# Altium PCB mchf_pro_rf.PcbDoc (part 3 of 3)
Units mil, origin at the board's own origin, x right, y up, seen from the top; angles counter-clockwise.
Board outline 7874.02 x 5512.23 mil, 2 copper layers (Top Layer, Bottom Layer); 347 components, 225 nets, 1009 pads, 443 vias.
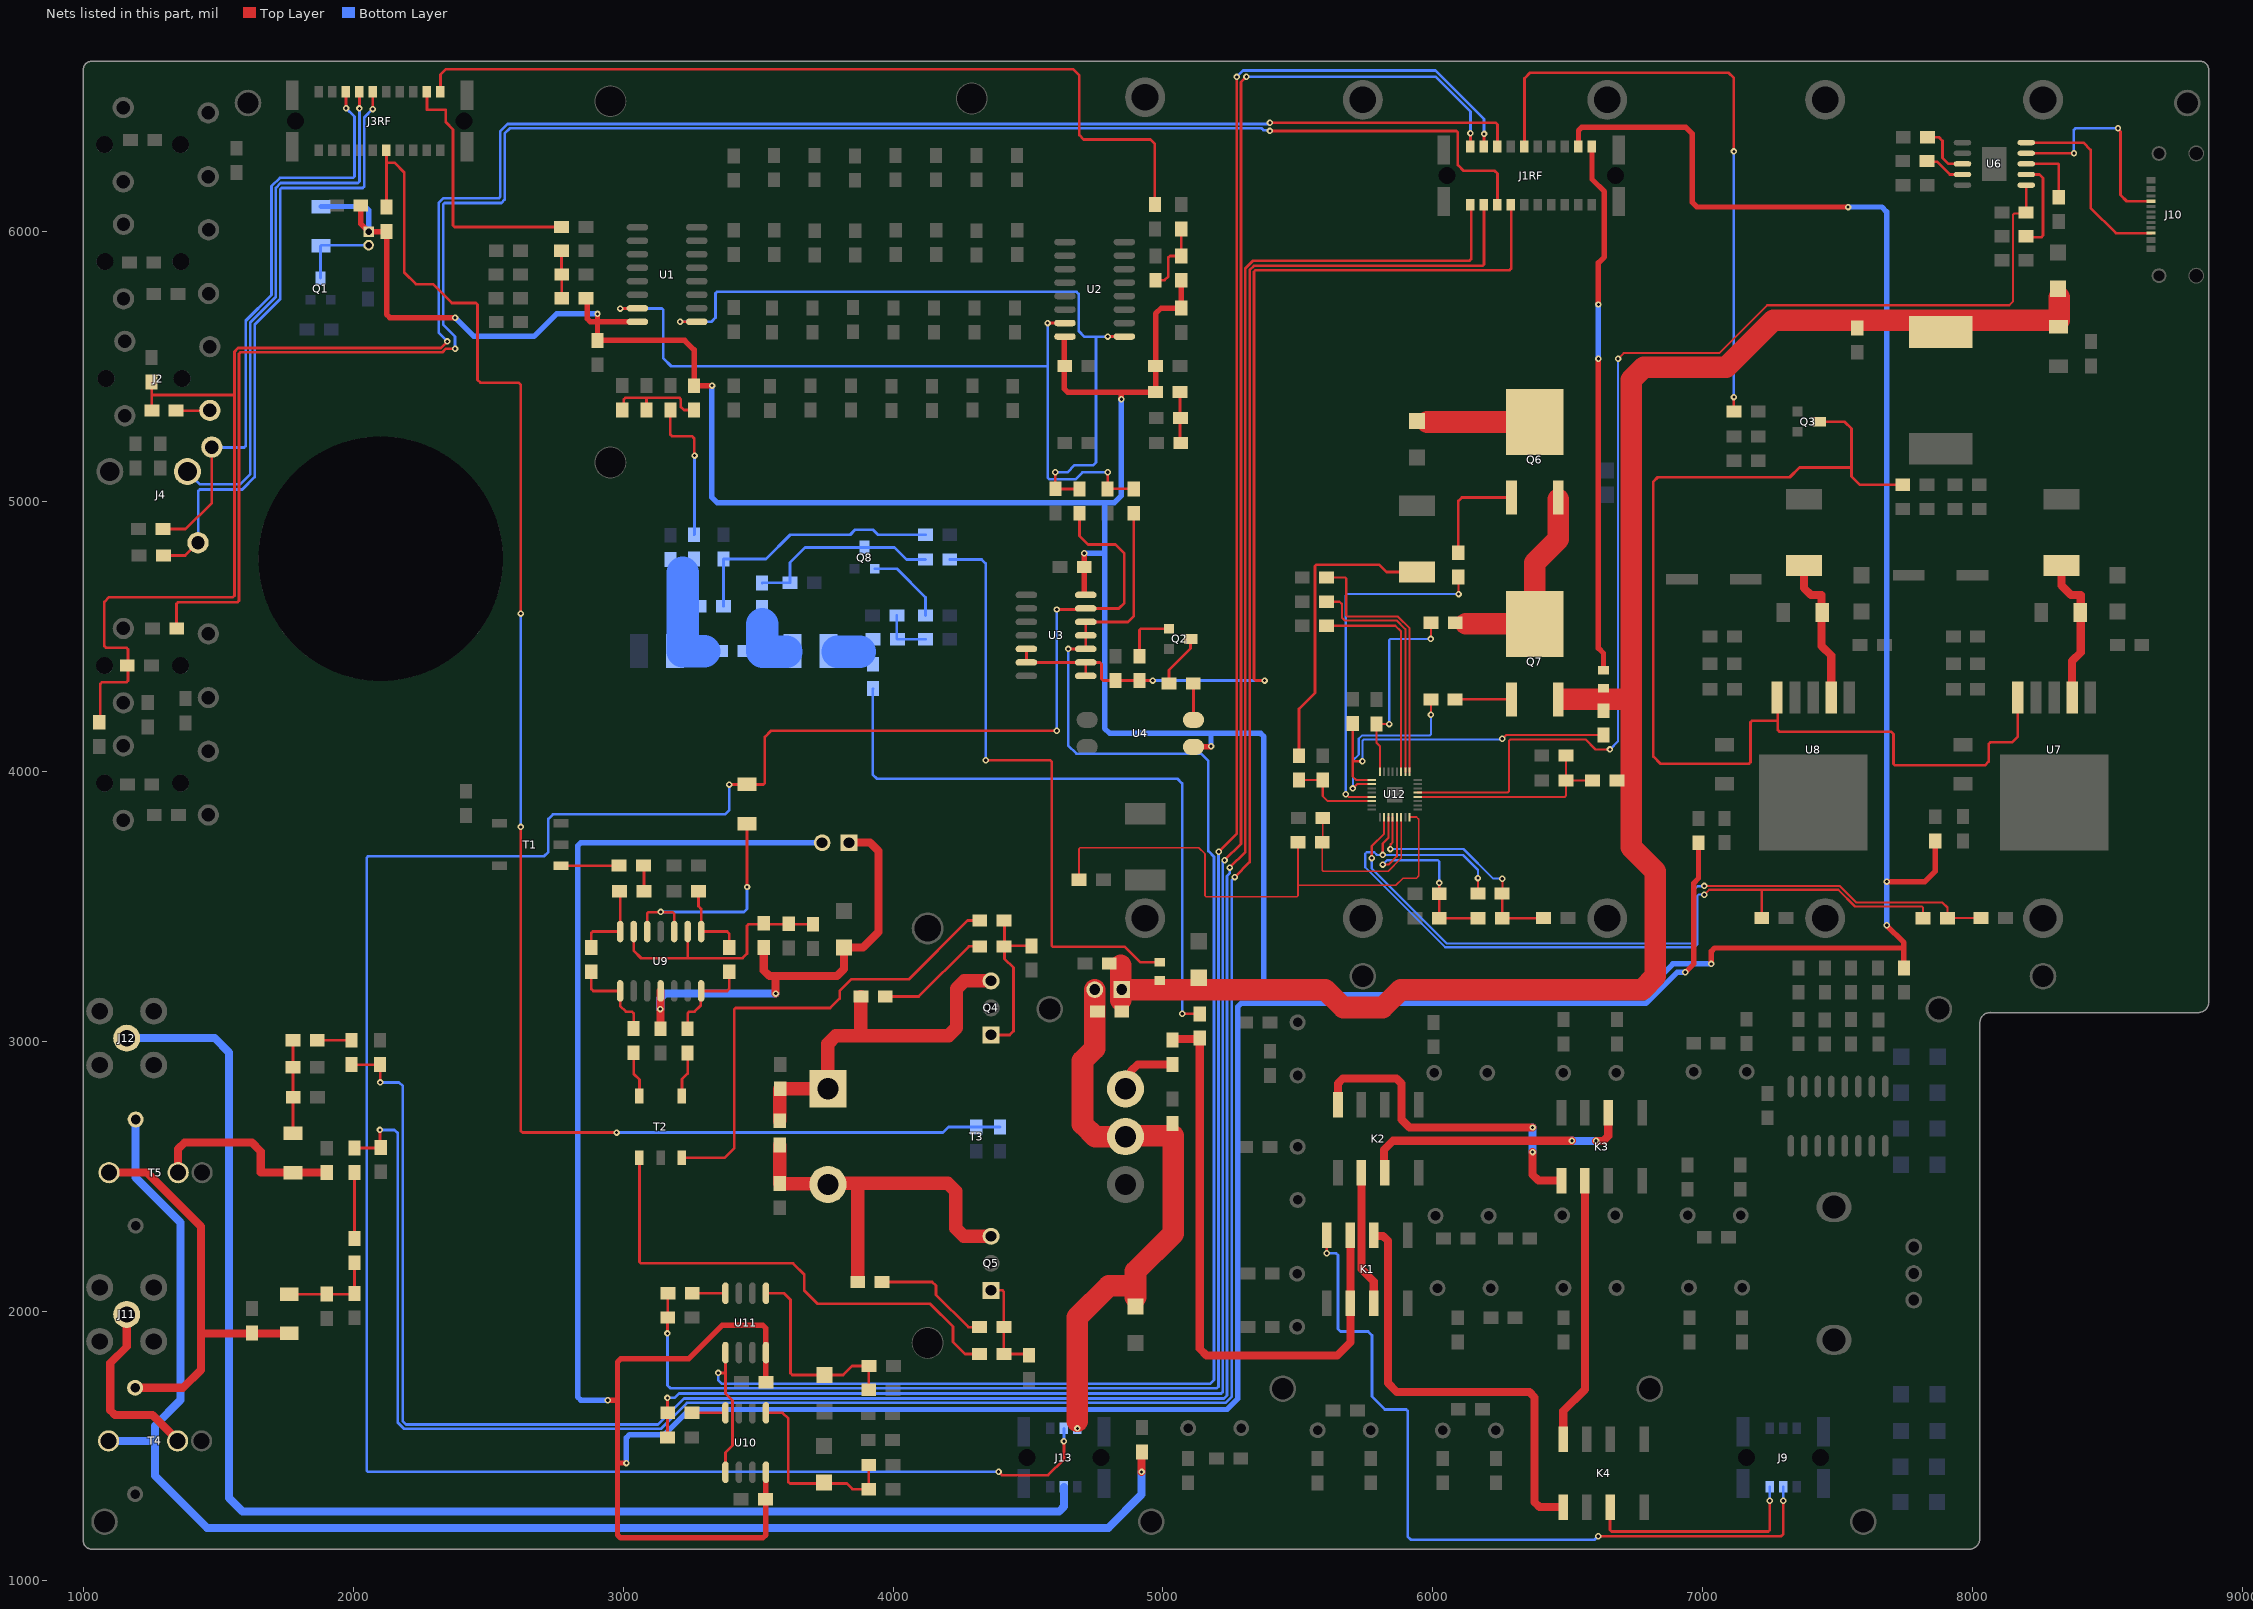
[diagram p3: the nets of this part, all layers, seen from the top]

## Via types
v1: diameter 30, hole 15, Top Layer to Bottom Layer, 263 vias
v2: diameter 24, hole 12, Top Layer to Bottom Layer, 180 vias

## Nets (pads, with @x,y where several pads share a name; then routed paths per layer and width w, separated by ;. In a path a pad name is that pad's centre, name@x,y a point inside that pad or via, vN(x,y) a via of type N, cw(c..) or ccw(c..) an arc to the next point about the centre after c; other vN are vias at no path point) (continued)
NetC93_1: C93.1 T1.1 | length 220.8
  Top Layer w10: T1.1@2770.17,3649.26 2770.91,3650 C93.1@2985,3650 C93.1@2989,3654
NetC93_2: C93.2 R46.2 | length 95.8
  Top Layer w10: C93.2@3075,3650 3077,3648 R46.2@3077,3555
NetC94_2: C94.2 R42.2 R43.2 U9.2 U9.6 | length 961.3
  Top Layer w10: U9.6@3039,3406 3039,3335 3067,3307 3239,3307 U9.2@3239,3406 ; 3239,3307.21 3442.21,3307.21 3459,3324 3459,3427.14 3464.86,3433 3517.14,3433 R43.2@3521,3436.86 3524.86,3433 3613.78,3433 R42.2@3703,3433
NetC95_2: C95.2 C96.1 R43.1 RFC4.2 U9.11 | length 1732.7
  Top Layer w30: C95.2@3138,3046 3138.5,3046.5 3138.5,3185.5 U9.11@3139,3186 ; R43.1@3521,3346.86 3521,3261.57 3541.57,3241 3563,3241 ; v2(3565,3176) 3565,3239 3563,3241 ; RFC4.2@3840,3735.18 3914.66,3735.18 3946,3703.84 3946,3404 3888.83,3346.83 3818.08,3346.83 3818.08,3267.08 3792,3241 3563,3241
  Bottom Layer w30: v2(3137.35,3118.77) 3137.35,3158.43 3154.92,3176 v2(3565,3176)
NetC97_1: C97.1 C99.1 Q4.1 R50.1 | length 613.3
  Top Layer w10: Q4.1@4363,3023 4432,3023 4446,3037 4446,3272 4413,3305 C99.1@4413,3351 ; C97.1@4413,3447 C99.1@4413,3351 ; R50.1@4513,3353 4415,3353 C99.1@4413,3351
NetC97_2: C97.2 T2.3 | length 1785.2
  Top Layer w10: T2.3@3217.74,2567.83 3376.26,2567.83 3411.25,2602.81 3411.25,3117.14 3417.1,3123 3767,3123 3802,3158 3802,3186.12 3844.91,3229.02 4058.02,3229.02 4276,3447 C97.2@4321,3447
NetC98_1: C98.1 C100.1 Q5.1 R51.1 | length 367.8
  Top Layer w10: Q5.1@4363,2077 4404.74,2077 4410.6,2071.14 C100.1@4410.6,1940.35 C98.1@4410.6,1840.78 R51.1@4498.05,1840.78
NetC98_2: C98.2 T2.1 | length 1851.7
  Top Layer w10: T2.1@3060.26,2567.83 3060.26,2182.6 3066.12,2176.74 3629.85,2176.74 3671,2135.59 3671,2076 3720,2027 4137,2027 4222,1942 4222,1885.29 4266.51,1840.78 C98.2@4317,1840.78
NetC99_2: C99.2 R52.2 | length 427
  Top Layer w10: R52.2@3971,3165 4094.94,3165 4280.94,3351 C99.2@4321,3351
NetC100_2: C100.2 R53.2 | length 451
  Top Layer w10: R53.2@3959,2108 4145,2108 4159,2094 4159,2060 4278.65,1940.35 C100.2@4320.6,1940.35
NetC101_2: C101.2 C102.1 Q4.3 R52.1 T3.1 | length 1394.2
  Top Layer w50: C102.1@3580,2705 3581,2706 3581,2822.33 C101.2@3582,2823.33 T3.1@3758.64,2823.33 3758.64,2990.71 3787.93,3020 3879,3020 ; R52.1@3881,3165 3881,3022 3879,3020 ; Q4.3@4363,3223 4264.29,3223 4235,3193.71 4235,3049.29 4205.71,3020 3879,3020
NetC102_2: C102.2 C103.1 Q5.3 R53.1 T3.3 | length 1434.2
  Top Layer w50: C102.2@3580,2615 C103.1@3580,2473 3582,2471 3756.64,2471 T3.3@3758.64,2469 3762.64,2473 3869,2473 ; R53.1@3869,2128.84 3869,2473 ; Q5.3@4363,2277 4261.29,2277 4232,2306.29 4232,2443.71 4202.71,2473 3869,2473
NetC112_1: C112.1 R57.2 RFC6.1 U10.1 | length 728.7
  Top Layer w10: U10.1@3529,1623 3591.13,1623 3612,1602.13 3612,1366.86 3617.86,1361 3740,1361 C112.1@3744,1365 3748,1361 3829,1361 3849.9,1340.1 R57.2@3910.14,1340.1 3910.14,1429.18 RFC6.1@3910,1429.32
NetC113_1: C113.1 R58.2 RFC7.1 U11.1 | length 768.7
  Top Layer w10: U11.1@3529,2066 3595.81,2066 3619.86,2041.95 3619.86,1770.14 3626.68,1763.32 C113.1@3746,1763.32 3815.32,1763.32 3848.32,1796.32 R58.2@3911,1796.32 3910,1795.32 RFC7.1@3910,1708.32
NetC119_1: C119.1 R63.1 U12.2 | length 2854.7
  Top Layer w8: v2(5773.47,3678) 5773.47,3722.87 5819.1,3768.5 U12.2@5819.1,3830.12 ; v2(7005,3575) 7507.49,3575 7569.47,3513.02 7887.98,3513.02 7906.14,3494.86 C119.1@7906.14,3455.28 7906.86,3456 R63.1@8030.85,3456
  Bottom Layer w8: v2(5773.47,3678) 5773.47,3639.43 6050.9,3362 6959.29,3362 6965,3367.71 6965,3558 6981,3574 7004,3574 v2(7005,3575)
NetC119_2: C119.2 C120.1 R64.1 U12.3 | length 3289.4
  Top Layer w8: v2(5813.98,3689.73) 5813.98,3731.88 5834.85,3752.75 U12.3@5834.85,3830.2 ; C120.1@6166.41,3546.57 6166.88,3547.04 v2(6166.88,3603.96) ; v2(7004.95,3542.67) 7023.28,3561 7218,3561 ; R64.1@7218,3456 7218,3561 ; C119.2@7816.14,3455.28 7816.14,3494.33 7811.46,3499.02 7563.67,3499.02 7501.69,3561 7218,3561
  Bottom Layer w8: v2(6166.88,3603.96) 6166.74,3604.1 6166.74,3634.26 6111.27,3689.73 v2(5813.98,3689.73) 5792.85,3689.73 5782.58,3700 5755.12,3700 5749.52,3694.4 5749.52,3643.58 6045.11,3348 6970,3348 6979.42,3357.42 6979.42,3537.98 6984.11,3542.67 v2(7004.95,3542.67)
NetC120_2: C120.2 C121.1 R65.1 U12.4 | length 897
  Top Layer w8: v2(5842.55,3711.73) 5842.55,3728.71 5850.6,3736.75 U12.4@5850.6,3830.12 ; C120.2@6256.41,3546.57 6257.18,3547.34 v2(6257.18,3601.87) ; C120.2@6256.74,3561.13 C121.1@6256.74,3455.06 6257.18,3455.5 R65.1@6410,3455.5
  Bottom Layer w8: v2(5842.55,3711.73) 6113.27,3711.73 6223.13,3601.87 v2(6257.18,3601.87)
NetC121_2: C121.2 C122.1 R66.1 U12.5 | length 781.7
  Top Layer w8: v2(5814,3654) 5835.3,3654 5866.34,3685.04 U12.5@5866.34,3830.12 ; v2(6023.23,3586) C122.1@6023.23,3546.13 R66.1@6023.23,3455.29 6023.46,3455.06 C121.2@6166.74,3455.06
  Bottom Layer w8: v2(5814,3654) 5830,3670 6018.54,3670 6023.23,3665.31 v2(6023.23,3586)
NetC123_2: C123.2 R62.1 U12.30 | length 336.4
  Top Layer w8: R62.1@5504.18,3967 C123.2@5592,3967 5592,3907.51 5610.43,3889.08 U12.30@5773.47,3889.08
NetC124_2: C124.2 R71.2 U12.24 | length 756.6
  Top Layer w8: U12.24@5803.35,3997.7 5803.35,4093.65 5791,4106 C124.2@5791,4175 5791.41,4174.59 v2(5838.03,4174.59) ; v2(5992.33,4490) 5992.33,4549.56 R71.2@5992.66,4549.89
  Bottom Layer w8: v2(5838.03,4174.59) 5838.03,4485.31 5842.71,4490 v2(5992.33,4490)
NetC125_1: C125.1 R73.1 U12.25 | length 1285.8
  Top Layer w8: C125.1@5703,4176.47 5703,4037 ; v2(5739,4037) 5703,4037 ; U12.25@5773.47,3967.82 5715.18,3967.82 5703,3980 5703,4037 ; v2(6257.18,4119.86) 6271.32,4134 R73.1@6632,4134
  Bottom Layer w8: v2(5739,4037) 5739,4113.15 5743.69,4117.84 6255.16,4117.84 v2(6257.18,4119.86)
NetC126_1: C126.1 R77.2 R78.1 U12.12 | length 797.4
  Top Layer w8: U12.12@5943.47,3904.83 U12.12@5943.47,3904.83 6488.49,3904.76 6493.17,3909.45 R78.1@6493.17,3966 ; C126.1@6493.17,4057 R78.1@6493.17,3966 ; R77.2@6591.37,3966 R78.1@6493.17,3966
NetC129_2: C129.2 D7.2 R80.2 RFC8.2 | length 345
  Top Layer w10: D7.2@1777,2658 C129.2@1777,2903 RFC8.2@1777,3003
NetC130_1: C130.1 D8.2 R82.1 RFC9.2 | length 357.2
  Top Layer w10: D8.2@1763,2062 2002,2062 C130.1@2005,2065 RFC9.2@2005,2179
NetC131_1: C131.1 D9.2 RFC10.1 | length 82
  Bottom Layer w120: D9.2@3794,4443 3876,4443
NetC131_2: C131.2 M10.2 | length 2397.6
  Top Layer w10: v2(5071,3101) M10.2@5136,3101
  Bottom Layer w10: C131.2@3926,4306 3924.35,4304.35 3924.35,3988.45 3940.8,3972 5053.73,3972 5071,3954.73 v2(5071,3101)
NetC132_2: C132.2 R84.2 RFC10.2 | length 192.8
  Bottom Layer w10: C132.2@4014,4577 4014,4491 RFC10.2@4016,4489 R84.2@4120,4489
NetC133_1: C133.1 Q8.3 R86.1 RFC11.1 | length 723.1
  Bottom Layer w10: RFC11.1@3515,4697 3516,4698 C133.1@3618,4698 3618,4773 3673.61,4828.61 3892.61,4828.61 Q8.3@3894,4830 3895.39,4828.61 4004.8,4828.61 4049.41,4784 R86.1@4120,4784
NetC134_1: C134.1 C136.2 C137.2 D10.2 RFC12.1 | length 370.2
  Bottom Layer w120: 3221,4735 3221,4444.78 3301,4444.78
NetC134_2: C134.2 D9.1 RFC11.2 | length 189
  Bottom Layer w120: 3515,4544 3515,4444.77 3516.77,4443 D9.1@3604,4443
NetC135_2: C135.2 R83.1 RFC12.2 | length 975.5
  Bottom Layer w10: RFC12.2@3372,4611 C135.2@3372,4786 3529,4786 3619,4876 3841.34,4876 3859.74,4894.4 3926,4894.4 3944.4,4876 R83.1@4120,4876
NetC136_1: C136.1 M1.2 | length 543.7
  Top Layer w10: M1.2@3175.08,5338.33 3175.08,5246.86 3180.94,5241 3255.5,5241 3263,5233.5 3263,5170.74 v2(3264.5,5169.24)
  Bottom Layer w10: C136.1@3263,4876 3264.5,4877.5 v2(3264.5,5169.24)
NetD1_1: D1.1 P1.2 Q1.3 | length 297.7
  Bottom Layer w10: Q1.3@1879,5827 1879,5945 D1.1@1881,5947 1883,5949 P1.2@2057,5949
NetD3_2: D3.2 L28.1 U7.2 | length 552.9
  Top Layer w30: D3.2@8328.45,4761.83 8328.45,4688.55 8364,4653 8400.09,4653 8400.09,4440.09 8368.09,4408.09 U7.2@8368.09,4273.06
NetD4_2: D4.2 L29.1 U8.2 | length 554.1
  Top Layer w30: D4.2@7373.99,4761.83 7373.99,4679.01 7400,4653 7439.6,4653 7439.6,4464.4 7475.6,4428.4 U8.2@7475.6,4273.06
NetD5_2: D5.2 U9.3 U9.5 | length 877.9
  Top Layer w10: U9.5@3089,3406 3089,3472.14 3094.86,3478 3183.14,3478 3189,3472.14 U9.3@3189,3406 ; v2(3459,3571) D5.2@3459,3805.8
  Bottom Layer w10: v2(3138.93,3478.68) 3448.1,3478.68 3459,3489.58 v2(3459,3571)
NetD6_2: D6.2 R62.2 | length 1118.2
  Top Layer w10: R62.2@5504.18,4057 5504.18,4231.18 5563.08,4290.08 5563.08,4759.22 5568.93,4765.08 5800.67,4765.08 5827.76,4738 D6.2@5941,4738
NetD7_1: D7.1 R79.2 T5.4 | length 739.6
  Top Layer w30: T5.4@1351.48,2512.85 1351.48,2599.76 1375.72,2624 1625,2624 1657.5,2591.5 1657.5,2512.85 1776.85,2512.85 D7.1@1777,2513 R79.2@1902,2513
NetD8_1: D8.1 R81.1 T4.2 T5.3 | length 1552.7
  Top Layer w30: T5.3@1095.57,2512.85 1236.15,2512.85 1436,2313 1436,1917 ; T4.2@1192,1715.7 1369.7,1715.7 1436,1782 1436,1917 ; D8.1@1763,1917 1436,1917
NetF2_2: F2.2 Q6.2 | length 398.6
  Top Layer w80: 5979.05,5293.53 Q6.2@6377.61,5293.53
NetJ1RF_A11: J1RF.A11 M9.1 | length 1976
  Top Layer w20: J1RF.A11@6589.17,6314.54 6589.17,6193.03 6635,6147.2 6635,5905.04 6613,5883.04 v2(6613,5729) ; v2(6613,5528) 6613,4456 6632,4437 M9.1@6632,4374.5
  Bottom Layer w20: v2(6613,5528) v2(6613,5729)
NetJ2_R: J2.R R15.1 | length 125
  Top Layer w10: R15.1@1344,5335.69 J2.R@1468.96,5335.69
NetJ9_B2: J9.B2 K1.4 | length 2946.4
  Top Layer w10: v2(5607,2214) 5607,2280.59 K1.4@5607.39,2280.98 ; v2(6612.18,1165.81) 7289.81,1165.81 7298,1174 v2(7298,1297.39)
  Bottom Layer w10: v2(5607,2214) 5641,2214 5648,2207 5648,1934 5658,1924 5760,1924 5774,1910 5774,1683.13 5821.72,1635.41 5900.75,1635.41 5906.61,1629.55 5906.61,1164.76 5918.63,1152.73 6599.11,1152.73 v2(6612.18,1165.81) ; v2(7298,1297.39) J9.B2@7298,1348.73
NetJ9_B3: J9.B3 K4.7 | length 841.4
  Top Layer w10: K4.7@6656.23,1274 6656.23,1188.96 6662.09,1183.11 7242.14,1183.11 7248,1188.96 v2(7248,1297.39)
  Bottom Layer w10: v2(7248,1297.39) J9.B3@7248,1348.73
NetJ10_A5: J10.A5 U6.7 | length 803.9
  Top Layer w10: U6.7@8198.11,6289.37 v2(8375,6289.37) ; v2(8538,6382) 8538,6378.7 8547.55,6369.14 8547.55,6134.33 8570.47,6111.42 J10.A5@8660.47,6111.42
  Bottom Layer w10: v2(8375,6289.37) 8374.46,6289.91 8374.46,6376.14 8380.31,6382 v2(8538,6382)
NetJ10_B5: J10.B5 U6.6 | length 727.5
  Top Layer w10: U6.6@8198.11,6328.74 8409.88,6328.74 8436.63,6302 8436.63,6086.55 8529.87,5993.31 J10.B5@8660.47,5993.31
NetJ11_1: J11.1 T4.4 | length 678.8
  Top Layer w30: J11.1@1161,1987.4 1161,1868 1100,1807 1100,1632.7 1117.57,1615.12 1256.88,1615.12 1349.48,1522.52 T4.4@1349.48,1518.85
NetJ12_1: J12.1 J13.A2 | length 5245.2
  Bottom Layer w30: J12.1@1161,3011.02 1487.12,3011.02 1540,2958.15 1540,1308 1590,1258 4615.43,1258 4633,1275.57 J13.A2@4633,1348.73
NetK1_2: K1.2 K4.5 | length 1656.3
  Top Layer w30: K1.2@5780.62,2280.98 5780.62,2280.72 5783.34,2278 5815.43,2278 5833,2260.43 5833,1733 5866,1700 6357.37,1700 6377.05,1680.32 6377.05,1291.57 6394.62,1274 K4.5@6483,1274
NetK1_3: K1.3 K1.6 M10.1 M11.1 | length 2234.3
  Top Layer w30: M11.1@5035,3004 5038.5,3007.5 M10.1@5132.5,3007.5 ; M10.1@5136,3011 5136,1860.57 5160.57,1836 5645.74,1836 5694.01,1884.26 K1.6@5694.01,2029.02 K1.3@5694.01,2280.98
NetK1_7: K1.7 K2.6 | length 501.9
  Top Layer w30: K2.6@5735.01,2512.02 5735.01,2155.27 5780.62,2109.65 K1.7@5780.62,2029.02
NetK2_4: K2.4 K3.5 | length 1251.8
  Top Layer w30: K2.4@5648.39,2763.98 5648.39,2843.43 5665.97,2861 5865.43,2861 5883,2843.43 5883,2710.32 5913.32,2680 v2(6369,2680) ; v2(6369,2589) 6369,2505 6390.98,2483.02 K3.5@6476.39,2483.02
  Bottom Layer w30: v2(6369,2589) v2(6369,2680)
NetK2_7: K2.7 K3.2 | length 1025.1
  Top Layer w30: K2.7@5821.62,2512.02 5818.91,2514.73 5818.91,2597.57 5852.34,2631 v2(6515,2631) ; v2(6604.47,2630.73) 6631.73,2630.73 6649.62,2648.62 K3.2@6649.62,2734.98
  Bottom Layer w30: v2(6515,2631) 6515.27,2630.73 v2(6604.47,2630.73)
NetK3_6: K3.6 K4.4 | length 990.2
  Top Layer w30: K4.4@6483,1525.97 6483,1629.85 6563.01,1709.86 K3.6@6563.01,2483.02
NetM11_2: M11.2 T3.4 | length 238
  Top Layer w30: T3.4@4861,2823.33 4881.63,2843.96 4881.63,2889.07 4906.55,2914 M11.2@5035,2914
NetM12_2: M12.2 T4.3 T5.2 | length 5545
  Top Layer w30: v2(4920.84,1403.8) 4920.84,1476.84 M12.2@4922,1478
  Bottom Layer w30: T4.3@1093.57,1518.85 1265.25,1518.85 ; T5.2@1194,2709.7 1194,2495 1360.55,2328.45 1360.55,1670.55 1265.25,1575.25 1265.25,1518.85 ; v2(4920.84,1403.8) 4920.84,1319.84 4798,1197 1458,1197 1265.25,1389.75 1265.25,1518.85
NetM22_1: M22.1 RFC8.1 | length 127
  Top Layer w10: RFC8.1@1867,3003 M22.1@1994,3003
NetM23_1: M23.1 RFC9.1 | length 244.8
  Top Layer w10: M23.1@2004.78,2513.71 2005,2513.48 RFC9.1@2005,2269
NetQ2_1: Q2.1 R20.1 | length 207.7
  Top Layer w10: R20.1@4913,4425.85 4913,4522.14 4918.86,4528 Q2.1@5022,4528
NetQ2_3: Q2.3 R19.2 | length 197.9
  Top Layer w10: R19.2@5021.99,4325.23 5021.99,4374.99 5102,4455 Q2.3@5102,4490
NetQ6_1: Q6.1 R70.2 | length 394.1
  Top Layer w10: R70.2@6094.04,4809.29 6094.04,5001.04 6107,5014 Q6.1@6291,5014
NetQ6_3: Q6.3 Q7.2 R71.1 | length 753.9
  Top Layer w80: 6121,4546 Q7.2@6377.61,4546 6377.61,4772.61 6464.23,4859.23 Q6.3@6464.23,5007.43
NetQ7_1: Q7.1 R72.2 | length 209.3
  Top Layer w10: R72.2@6082.33,4265 6083.81,4266.47 Q7.1@6291,4266.47
NetQ8_1: Q8.1 R85.2 | length 298.9
  Bottom Layer w10: Q8.1@3932,4750 4014,4750 4120,4644 R85.2@4120,4577
NetR1_2: R1.2 R3.2 R4.1 | length 385.8
  Top Layer w10: R3.2@2996.62,5338.33 3002.48,5344.19 3002.48,5377.84 3008.34,5383.7 3086.72,5383.7 ; R1.2@3086.72,5338.33 3086.72,5383.7 ; R4.1@3263,5338 3225.24,5338 3213.72,5349.52 3213.72,5377.84 3207.86,5383.7 3086.72,5383.7
NetR2_2: R2.2 R5.2 R6.1 | length 274.1
  Top Layer w10: R2.2@4972,5819 5006,5819 5020,5833 5020,5903 5026,5909 R5.2@5067.78,5909 R6.1@5067.78,6009
NetR7_2: R7.2 R8.1 R11.1 | length 176.6
  Top Layer w10: R11.1@2772,5928.29 2772,5840.2 R7.2@2772.33,5839.87 R8.1@2772.33,5751.87
NetR9_2: R9.2 R10.1 R12.1 | length 190
  Top Layer w10: R9.2@5062.63,5404.25 5062.63,5218.98 R12.1@5066,5215.61
NetR19_1: R19.1 U4.2 | length 135.6
  Top Layer w10: R19.1@5111.99,4325.23 5112.85,4324.38 U4.2@5112.85,4190
NetR29_1: R29.1 U6.8 | length 242.7
  Top Layer w10: U6.8@8198.11,6250 8316,6250 8318.45,6247.55 R29.1@8318.45,6126.23
NetR31_1: R31.1 U6.3 | length 207.3
  Top Layer w10: R31.1@7832.18,6348.63 7874.5,6348.63 7887.88,6335.26 7887.88,6272.5 7910.38,6250 U6.3@7961.89,6250
NetR32_1: R32.1 U6.9 | length 347.5
  Top Layer w10: R32.1@8195.81,5978.64 8254.32,5978.64 8260.17,5984.5 8260.17,6197.83 8247.37,6210.63 U6.9@8198.11,6210.63
NetR33_2: R33.2 U6.2 | length 151.7
  Top Layer w10: R33.2@7830.85,6260.44 7833,6258.28 7867.49,6258.28 7915.14,6210.63 U6.2@7961.89,6210.63
NetR34_1: R34.1 U6.10 U12.13 | length 4404.4
  Top Layer w8: U12.13@5943.47,3920.58 6277.14,3920.58 6281.82,3925.26 6281.82,4113.21 6286.51,4117.89 6565.4,4117.89 6602.58,4080.71 v2(6655.77,4080.71) ; v2(6685.75,5528.16) 6686.16,5528.16 6706.88,5548.88 7060.82,5548.88 7238.41,5726.46 8135.13,5726.46 8149.39,5740.73 8149.39,6061.45 8154.08,6066.14 8193.86,6066.14 R34.1@8197.76,6070.05 ; R34.1@8196.5,6071.31 8198.11,6072.91 U6.10@8198.11,6171.26
  Bottom Layer w8: v2(6655.77,4080.71) 6685.75,4110.69 v2(6685.75,5528.16)
NetR44_1: R44.1 R48.2 U9.14 | length 342.8
  Top Layer w10: R48.2@3239,3046 3239,3103.14 3244.86,3109 3265,3109 3287,3131 3287,3184 U9.14@3289,3186 3385.29,3186 3393,3193.71 R44.1@3393,3256.86
NetR44_2: R44.2 R45.1 U9.1 | length 311.8
  Top Layer w10: R45.1@3279,3555 3279,3500 3289,3490 U9.1@3289,3406 3385.29,3406 3393,3398.29 R44.2@3393,3346.86
NetR46_1: R46.1 R47.2 U9.7 | length 312.8
  Top Layer w10: R47.2@2881.78,3346.86 2881.78,3400.14 2887.64,3406 U9.7@2989,3406 2989,3553 R46.1@2987,3555
NetR47_1: R47.1 R49.2 U9.8 | length 346.8
  Top Layer w10: R47.1@2881.78,3256.86 2881.78,3193.71 2889.49,3186 U9.8@2989,3186 2989,3130 3010,3109 3032.92,3109 3038.78,3103.14 R49.2@3038.78,3046.86
NetR48_1: R48.1 T2.4 | length 168.6
  Top Layer w10: T2.4@3217.74,2796.17 3217.74,2859 3239,2880.26 R48.1@3239,2956
NetR49_1: R49.1 T2.6 | length 169.6
  Top Layer w10: R49.1@3038.78,2956.86 3038.78,2879.22 3060.26,2857.74 T2.6@3060.26,2796.17
NetR55_2: R55.2 U10.4 | length 123.9
  Top Layer w10: R55.2@3255.14,1623 U10.4@3379,1623
NetR56_2: R56.2 U11.4 | length 123
  Top Layer w10: R56.2@3256,2066 U11.4@3379,2066
NetR70_1: R70.1 U12.29 | length 1320.9
  Top Layer w8: v2(5676.99,3914.6) 5686.77,3904.83 U12.29@5773.47,3904.83 ; R70.1@6094.04,4719.29 6095,4718.33 v2(6095,4656)
  Bottom Layer w8: v2(5676.99,3914.6) 5676.99,4651.31 5681.68,4656 v2(6095,4656)
NetR72_1: R72.1 U12.26 | length 672.9
  Top Layer w8: v2(5703,3936.32) 5718.75,3952.07 U12.26@5773.47,3952.07 ; R72.1@5992.33,4265 5992.66,4264.67 v2(5992.66,4209)
  Bottom Layer w8: v2(5703,3936.32) 5703.97,3937.3 5703.97,4040.44 5725,4061.46 5725,4120.06 5736.78,4131.84 5987.98,4131.84 5992.66,4136.53 v2(5992.66,4209)
NetR74_1: R74.1 U12.19 | length 804.6
  Top Layer w8: R74.1@5606.14,4538.88 5860.67,4538.88 5882.09,4517.46 U12.19@5882.09,3997.7
NetR75_1: R75.1 U12.18 | length 891.6
  Top Layer w8: R75.1@5606.14,4627.7 5654.3,4627.7 5662.87,4619.13 5662.87,4568.81 5673.69,4558 5865.78,4558 5897.84,4525.94 U12.18@5897.84,3997.7
NetR76_1: R76.1 U12.17 | length 997.1
  Top Layer w8: R76.1@5606.14,4718.21 5673.97,4718.21 5678.65,4713.53 5678.65,4577.97 5683.34,4573.29 5870.29,4573.29 5913.59,4529.99 U12.17@5913.59,3997.7
P_DAH: C31.1 J1RF.A18 R15.2 R17.1 R18.1 | length 8033.9
  Top Layer w10: R18.1@1059.35,4181.35 1063.13,4185.13 1063.13,4323.86 1068.99,4329.72 1160.14,4329.72 1166,4335.57 1166,4365.8 1166,4390.94 1166,4451.4 1160.14,4457.26 1083.86,4457.26 1078,4463.12 1078,4627 1095.57,4644.57 1554.01,4644.57 1559.87,4650.43 1559.87,5393.54 ; R15.2@1254,5335.69 1254,5393.54 ; C31.1@1254,5436 1254,5393.54 ; v2(2348.8,5592.29) 2324.54,5568.03 1573.92,5568.03 1559.87,5553.98 1559.87,5393.54 ; v2(5396,6402) 6233.19,6402 6239.05,6396.14 J1RF.A18@6239.05,6309 ; 1254,5393.54 1559.87,5393.54
  Bottom Layer w10: v2(2348.8,5592.29) 2317.07,5624.02 2317.07,6106.34 2333.22,6122.49 2539.1,6122.49 2544.95,6128.35 2544.95,6371.16 2571.8,6398 5392,6398 v2(5396,6402)
P_DIT: J1RF.A8 R16.1 | length 7025.5
  Top Layer w10: R16.1@1346,4528.74 1345.68,4529.06 1345.68,4620.14 1351.54,4626 1570.85,4626 1576.71,4631.86 1576.71,5546.17 1582.57,5552.03 2331.17,5552.03 2344.3,5565.16 v2(2377.36,5565.16) ; v2(5396,6372) 6086.39,6372 6092.24,6366.14 6092.24,6245.91 6114.15,6224 6229,6224 6239.17,6213.83 J1RF.A8@6239.17,6098
  Bottom Layer w10: v2(2377.36,5565.16) 2377.36,5610.64 2333.07,5654.93 2333.07,6099.14 2338.93,6105 2548.73,6105 2560.95,6117.22 2560.95,6362.65 2580.31,6382 5364.63,6382 5371.95,6374.68 5393.32,6374.68 v2(5396,6372)
PA_BIAS0: C110.1 J1RF.A20 R55.1 | length 8135.8
  Top Layer w10: C110.1@3164,1532 3164,1621.86 R55.1@3165.14,1623 3164,1624.14 v2(3164,1678) ; v2(5228.31,3670) 5228.31,3670.31 5289,3731 5289,6553 v2(5309,6573) ; J1RF.A20@6139.17,6314.54 v2(6139.17,6363.11)
  Bottom Layer w10: v2(3164,1678) 3164.7,1678.7 3191,1678.7 3206.63,1694.33 5215.45,1694.33 5221.31,1700.19 5221.31,3663.31 5228,3670 v2(5228.31,3670) ; v2(5309,6573) 6010.15,6573 6139.17,6443.98 v2(6139.17,6363.11)
PA_BIAS1: C111.2 J1RF.A19 R56.1 | length 8372.8
  Top Layer w10: v2(3164,1917) 3164,1974.63 C111.2@3165.14,1975.78 3165.14,2065.14 R56.1@3166,2066 ; v2(5207,3702) 5273,3768 v2(5273,6572) ; J1RF.A19@6189.17,6314.54 6189.42,6314.78 v2(6189.42,6360.87)
  Bottom Layer w10: v2(3164,1917) 3164,1724.75 3174.51,1714.24 5199.45,1714.24 5205.31,1720.1 5205.31,3557.22 5205.31,3700.31 v2(5207,3702) ; v2(5273,6572) 5297,6596 6009.78,6596 6189.42,6416.36 v2(6189.42,6360.87)
PA_TEMP: C117.1 J3RF.A16 R60.2 R61.1 | length 5980.3
  Top Layer w10: J3RF.A16@2123.07,6300.39 2123.07,6254.45 ; R60.2@2123.25,6089.86 2123.07,6090.04 2123.07,6254.45 ; v2(2621,3793.39) 2621,2667.08 2626.86,2661.22 v2(2975.59,2661.22) ; v2(2621,4584) 2621,5431.19 2612.81,5439.38 2471.25,5439.38 2460.62,5450.01 2460.62,5728.79 2454.76,5734.65 2365.26,5734.65 2295.62,5804.28 2232.97,5804.28 2189,5848.25 2189,6218.44 2152.99,6254.45 2123.07,6254.45
  Bottom Layer w10: v2(2621,3793.39) v2(2621,4584) ; v2(2975.59,2661.22) 4185.08,2661.22 4205.86,2682 R61.1@4308,2682 C117.1@4396.43,2682
PACK_P: C78.2 C104.1 C105.2 D2.2 F1.1 M9.2 M121.2 Q7.3 R54.2 R73.2 R77.1 RFC1.1 RFC5.1 | length 6427.7
  Top Layer w80: 4844,3150.73 4844,3191 4844,3281 ; RFC5.1@4847,3191 4988,3191 5601.06,3191 5667.37,3124.69 5814.32,3124.69 5880.63,3191 6775.61,3191 6824.23,3239.62 6824.23,3628.77 6734.29,3718.71 6734.29,4266.47 6734.29,5449.54 6781.15,5496.41 7086.6,5496.41 7261.03,5670.84 7571.91,5670.84 8320,5670.84 8320,5756 ; 6487,4266.47 6722.4,4266.47
"PHONES L": C32.1 J3RF.A5 J4.T | length 2379.8
  Top Layer w10: C32.1@1297,4799 1377.54,4799 J4.T@1425,4846.46 ; v2(2072.15,6453.15) 2072.15,6516.93 J3RF.A5@2073.07,6516.93
  Bottom Layer w10: J4.T@1417.15,4828.68 J4.T@1434.92,4846.46 ; J4.T@1425,4846.46 1426.06,4847.52 1426.06,5038.02 1431.92,5043.88 1588.89,5043.88 1635,5089.99 1635,5654 1729.37,5748.37 1729.37,6154.43 1735.22,6160.29 2035.02,6160.29 2040.87,6166.15 2040.87,6421.87 v2(2072.15,6453.15)
"PHONES R": C33.2 J3RF.A3 J4.R | length 2216.3
  Top Layer w10: C33.2@1295,4897 1378.82,4897 1476.18,4994.36 J4.R@1476.18,5200.79 ; v2(1973.39,6456) 1973.39,6519.6 1976.4,6522.6 J3RF.A3@1977,6522
  Bottom Layer w10: J4.R@1473.99,5199 1596.14,5199 1602,5204.86 1602,5668.86 1697.37,5764.23 1697.37,6167.69 1727.99,6198.31 1998.61,6198.31 2004.47,6204.17 2004.47,6424.92 v2(1973.39,6456)
PTT: C25.1 M7.2 U1.1 U2.1 | length 2739.8
  Top Layer w10: v2(3210.86,5664.78) 3210.97,5664.89 3272.89,5664.89 U1.1@3273,5665 ; v2(4600.51,5107.29) 4600.51,5047.78 C25.1@4602.11,5046.18 4602.76,5045.53 M7.2@4690.7,5045.53 ; v2(4795,5610) 4795.07,5610.07 4856.71,5610.07 U2.1@4856.78,5610.14
  Bottom Layer w10: v2(3210.86,5664.78) 3326.48,5664.78 3342.03,5680.32 3342.03,5770.21 3347.88,5776.07 4679.93,5776.07 4688,5768 4688,5630.01 4708.01,5610 4751.51,5610 ; v2(4600.51,5107.29) 4645.65,5107.29 4672.36,5134 4742.04,5134 4751.51,5143.46 4751.51,5610 ; v2(4795,5610) 4751.51,5610
PTT_3V: C38.1 J1RF.A7 R20.2 U3.5 U3.6 U3.8 U3.9 | length 3786.6
  Top Layer w10: U3.5@4494,4453 U3.6@4494,4403 U3.9@4714,4403 ; U3.8@4714,4353 U3.9@4714,4403 ; v2(4962,4335.85) R20.2@4913,4335.85 C38.1@4824,4335.85 4777.77,4335.85 4771.91,4341.71 4771.91,4397.14 4766.06,4403 U3.9@4714,4403 ; v2(5376.15,4335.85) 5343.04,4335.85 5337.18,4341.71 5337.18,5850.14 5343.04,5856 6284.28,5856 6290.14,5861.86 6290.14,6097.03 J1RF.A7@6289.17,6098
  Bottom Layer w10: v2(4962,4335.85) v2(5376.15,4335.85)
PTT_5V: D5.1 J13.B2 M7.1 U3.13 | length 9148.5
  Top Layer w10: v2(3393,3950.61) 3458.76,3950.61 D5.1@3458.95,3950.8 3519,3950.8 3524.86,3956.66 3524.86,4127.52 3546.89,4149.55 v2(4606.11,4149.55) ; v2(4391.06,1404.48) 4391.3,1404.48 4403.92,1391.86 4574.5,1391.86 4633.14,1450.5 v2(4633.14,1518) ; v2(4606.11,4599.08) 4710.08,4599.08 U3.13@4714,4603 4836,4603 4856.78,4623.78 4856.78,4807.22 4824,4840 4722,4840 4690.7,4871.3 M7.1@4690.7,4955.53
  Bottom Layer w10: v2(3393,3950.61) 3393,3855.14 3377.86,3840 2740,3840 2723,3823 2723,3701 2707,3685 2055.56,3685 2049.7,3679.14 2049.7,1410.34 2055.56,1404.48 v2(4391.06,1404.48) ; v2(4606.11,4149.55) v2(4606.11,4599.08) ; J13.B2@4633,1565.27 4633.14,1565.13 v2(4633.14,1518)
PTT_N: C26.1 M8.2 U1.15 U2.15 | length 2871.5
  Top Layer w10: v2(2989.17,5713.94) 2989.7,5714.47 3052.47,5714.47 U1.15@3053,5715 ; v2@4572.57,5660.17 U2.15@4636.75,5660.17 ; v2(4795,5107.29) C26.1@4795,5045.86 M8.2@4891.78,5045.86
  Bottom Layer w10: v2(2989.17,5713.94) 3143.17,5713.94 3149.03,5708.08 3149.03,5529.4 3178.17,5500.25 4533.62,5500.25 4533.94,5500.58 4572.55,5500.58 ; v2(4572.55,5660.2) 4572.55,5500.58 ; v2(4795,5107.29) 4701.99,5107.29 4683,5088.29 4683,5087.8 4677.14,5081.94 4578.41,5081.94 4572.55,5087.8 4572.55,5500.58
PTT_N5V: M8.1 U3.10 U3.11 U3.12 U10.5 U11.5 | length 6302.6
  Top Layer w10: v2(3352,1771) 3352.5,1770.5 3379,1770.5 ; U10.5@3379,1403 3379,1476 3405,1502 3405,1669 3379,1695 3379,1770.5 ; U11.5@3379,1846 3379,1770.5 ; v2(4648.64,4453.09) 4648.69,4453.04 U3.10@4714,4453 U3.10@4714,4453 U3.11@4714,4503 U3.12@4714,4553 4870,4553 4891.78,4574.78 M8.1@4891.78,4955.86
  Bottom Layer w10: v2(3352,1771) 3352,1744 3365,1731 5175.31,1731 5189.31,1745 5189.31,2742.66 5189.31,3683 5168,3704.31 5168,4037 5140,4065 4679,4065 4648.64,4095.36 v2(4648.64,4453.09)
PWR_FWD: C127.2 J1RF.A10 M22.2 | length 9860.9
  Top Layer w10: M22.2@1994,2913 C127.2@2099.71,2913 2100,2912.71 v2(2100,2847) ; v2(5247,3643) 5305,3701 5305,5863.21 5332.79,5891 6136.02,5891 6141.88,5896.86 J1RF.A10@6141.88,6097.61
  Bottom Layer w10: v2(2100,2847) 2170,2847 2184,2833 2184,1591.47 2195.47,1580 3129.31,1580 3225.61,1676.3 5225.88,1676.3 5237.31,1687.73 5237.31,3611.84 5247,3621.53 v2(5247,3643)
PWR_RET: C128.1 J1RF.A9 M23.2 | length 9745.8
  Top Layer w10: M23.2@2004.78,2603.71 2099.71,2603.71 2099,2604.41 v2(2099,2671) ; v2(5266,3608) 5321,3663 5321,5856.59 5336.41,5872 6183.37,5872 6189.23,5877.86 J1RF.A9@6189.23,6091.79
  Bottom Layer w10: v2(2099,2671) 2153,2671 2165,2659 2165,1587.85 2188.85,1564 3140.08,1564 3235.97,1659.89 5232.09,1659.89 5254.35,1682.14 5254.35,3595.14 5266,3606.79 v2(5266,3608)
RX_QSD_IN: J3RF.A10 M4.1 | length 3188.7
  Top Layer w10: J3RF.A10@2323.07,6516.93 2323.07,6581.02 2342.96,6600.91 4667.09,6600.91 4690,6578 4690,6356.21 4706.21,6340 4953.72,6340 4970,6323.72 M4.1@4970,6099
"SPK RET": J3RF.A4 J4.B | length 2019.5
  Top Layer w10: v2(2023.02,6455.57) 2023.02,6516.88 J3RF.A4@2023.07,6516.93
  Bottom Layer w10: J4.B@1385.63,5110.24 1433.09,5062.78 1580.78,5062.78 1619,5101 1619,5663.24 1713.37,5757.6 1713.37,6161.06 1731.41,6179.1 2017.16,6179.1 2023.02,6184.96 v2(2023.02,6455.57)
SRN: C118.1 R69.1 U12.6 | length 659.9
  Top Layer w6: R69.1@5592,3826 5592,3739 C118.1@5590,3737 5590,3633.01 5593.51,3629.5 5834.07,3629.5 5882.09,3677.52 U12.6@5882.09,3830.12
SRP: C118.2 R67.1 U12.8 | length 2002.8
  Top Layer w6: R67.1@4689,3598 4689,3712.17 4693.69,3716.86 5132.82,3716.86 5155.61,3694.06 5155.61,3538.47 5159.13,3534.95 5496.49,3534.95 5500,3538.47 5500,3577.21 ; C118.2@5500,3737 5500,3577.21 ; U12.8@5913.59,3830.12 5939.41,3830.12 5947.61,3821.93 5947.61,3612.24 5938.82,3603.45 5889,3603.45 5862.76,3577.21 5500,3577.21
TRSW_20V: M121.1 R86.2 | length 2220.9
  Top Layer w10: v2(4343,4041) 4581.6,4041 4587.46,4035.14 4587.46,3355.22 4593.32,3349.37 4858.69,3349.37 4916.06,3292 M121.1@4988,3292
  Bottom Layer w10: R86.2@4210,4784 4328.31,4784 4343,4769.31 v2(4343,4041)
TRX_20V: C106.2 C107.1 J13.B3 R54.1 RFC5.2 T3.2 | length 2181.2
  Top Layer w80: 4683,1592.06 4683,1977 4800,2094 4893,2094 4898,2099 ; RFC5.2@4747,3191 4747,2972.73 4701.87,2927.6 4701.87,2693.03 4748.74,2646.17 T3.2@4861,2646.17 4864.83,2650 5038,2650 5038,2287 4898,2147 4898,2099 ; 4898,2051 4898,2099
  other v2: 4683,1565.27
TX_MIX: J3RF.A9 M2.2 | length 980.3
  Top Layer w10: J3RF.A9@2273.07,6516.93 2273.54,6516.46 2273.54,6450.11 2342.96,6450.11 2342.96,6404.11 2370,6377.07 2370,6021.86 2375.86,6016 M2.2@2772,6016
VCC_5V: C1.1 C2.1 C27.1 C28.1 C38a.1 C116.2 D1.2 J1RF.A12 M13.2 M20.1 P1.1 R4.2 R5.1 R8.2 R9.1 R60.1 U1.16 U2.16 U3.14 U4.1 | length 15727.2
  Top Layer w20: C116.2@2027.76,6095.22 2027.76,6028.24 P1.1@2057,5999 2112.31,5999 2124.03,5987.28 2124.03,5692.04 2135.74,5680.32 v2(2377.36,5680.32) ; R8.2@2862.33,5751.87 2867,5747.2 2867,5676.72 2878.72,5665 2905.16,5665 ; v2(2905,5694) 2905.16,5693.84 2905.16,5665 ; U1.16@3053,5665 2905.16,5665 ; v2(3329.41,5428.6) 3329.3,5428.5 3263.5,5428.5 R4.2@3263,5428 3263,5561 3228,5596 C1.1@2905,5596 2905.16,5596.16 2905.16,5665 ; U2.16@4643,5608.3 4641.15,5610.14 U2.16@4636.78,5610.14 4636.48,5610.14 4634.63,5608.3 4634.63,5415.97 4646.35,5404.25 4846,5404.25 ; v2(4708,4807.22) C38a.1@4708,4756 4708,4654.85 4709.85,4653 U3.14@4714,4653 ; v2(4846,5378) 4846,5404.25 ; R5.1@5067.78,5819 R5.1@5067.78,5819 5067.82,5715.79 C27.1@5067.86,5715.75 4993.57,5715.75 4972.63,5694.81 C28.1@4972.63,5501.61 R9.1@4972.63,5404.25 4846,5404.25 ; U4.1@5112.85,4090 5114.09,4091.23 5177.23,4091.23 v2(5178,4092) ; J1RF.A12@6539.17,6314.54 6539.17,6373.28 6550.89,6385 6936.87,6385 6960,6361.87 6960,6107.85 6977.85,6090 v2(7538,6090) ; v2(7031.43,3285.99) 7031.43,3332.7 7043.73,3345 7745,3345 ; v2(7681,3429) 7745,3365 7745,3345 ; v2(7681,3591) 7823,3591 7860.87,3628.87 M20.1@7860.87,3741.23 ; M13.2@7745,3271 7745,3345
  Bottom Layer w20: D1.2@1881,6092 2044.26,6092 2057,6079.26 P1.1@2057,5999 ; v2(2377.36,5680.32) 2447.05,5610.64 2669.93,5610.64 2753.29,5694 v2(2905,5694) ; v2@3329,5429 3329,5014 3349,4994 4784,4994 ; v2(4708,4807.22) 4783.22,4807.22 4784,4808 ; v2(4846,5378) 4846,5021 4819,4994 4784,4994 ; v2(5178,4092) 5178,4140 ; v2(7031.43,3285.99) 6889.18,3285.99 6775.74,3172.55 5385.28,3172.55 5373.57,3184.26 5373.57,4128.28 5361.85,4140 5178,4140 ; v2(7538,6090) 7663,6090 7681,6072 v2(7681,3591) v2(7681,3429) ; 4784,4808 4784,4158.85 4802.85,4140 5178,4140 ; 4784,4808 4784,4994
VCC_8V: C108.1 C109.1 M21.1 RFC4.1 U10.8 U11.8 | length 11464.2
  Top Layer w20: v2(2943,1670) 2943.77,1669.23 2978.77,1669.23 2979,1669 ; v2(3012,1437) 2979,1437 ; U10.8@3529,1403 3529,1305 C108.1@3527,1303 3529,1301 3529,1171.17 3517.28,1159.45 2990.72,1159.45 2979,1171.17 2979,1437 ; C109.1@3529,1736 U11.8@3529,1846 3529,1936.06 3517.28,1947.78 3367.78,1947.78 3244,1824 2991.88,1824 2979,1811.12 2979,1669 ; v2(6934.74,3255.05) 6966.36,3286.67 6966.36,3586 6983.78,3603.42 M21.1@6983.78,3735 ; 2979,1437 2979,1669
  Bottom Layer w20: v2(2943,1670) 2843.22,1670 2831.5,1681.72 2831.5,3723.46 2843.22,3735.18 RFC4.1@3737.14,3735.18 ; v2(3012,1437) 3012,1530.28 3023.72,1542 3153,1542 3246.41,1635.41 5237.31,1635.41 5277.49,1675.59 5277.49,3128.05 5289.21,3139.77 6789.1,3139.77 6904.38,3255.05 v2(6934.74,3255.05)
VCC_58V_ON: J1RF.A16 R39.1 | length 2280.9
  Top Layer w10: J1RF.A16@6339.17,6314.54 6339.17,6567.01 6359.69,6587.53 7095.47,6587.53 7115,6568 v2(7115,6296) ; R39.1@7115,5332 v2(7115,5386)
  Bottom Layer w10: v2(7115,5386) v2(7115,6296)
VCC_58V_ON_DIRTY: Q3.3 R41.1 U7.5 U8.5 | length 4266.5
  Top Layer w10: U8.5@7274.6,4273.06 7278,4269.65 7278,4186 ; Q3.3@7430.34,5294.61 7525.39,5294.61 7551,5269 7551,5125 ; R41.1@7740.49,5061.08 7582.39,5061.08 7551,5092.48 7551,5125 ; U7.5@8167.09,4273.06 8167.09,4129.09 8145,4107 8064.86,4107 8059,4101.14 8059,4036.15 8044.58,4021.73 7712.36,4021.73 7706.5,4027.59 7706.5,4137.47 7697.42,4146.55 7283.86,4146.55 7278,4152.41 7278,4186 ; 7278,4186 7277,4187 7182.29,4187 7176.44,4181.14 7176.44,4033.45 7170.58,4027.59 6842.96,4027.59 6816.61,4053.95 6816.61,5072.61 6833,5089 7322,5089 7358,5125 7551,5125
pads on no net: J1RF.A17 J1RF.MH1 J1RF.MH2 J2.0 J3RF.MH1 J3RF.MH2 J5.0 J6.0 J7.0 J8.0 J9.A1 J9.A2 J9.A3 J9.MH1 J9.MH2 J10.A8 J10.B8 J10.MH3 J10.MH4 J10.MH5 J10.MH6 J13.MH1 J13.MH2 TF1.1 TF1.2 TF1.3 U5.10 U5.11 U9.9 U9.10 U9.12 U9.13 U12.1 U12.11 U12.15 U12.16 U12.20 U12.21 U12.22 U12.23 U12.27 U12.28 U12.31 U12.32

## Polygon pours and split planes (outlines as drawn)
GND on Top Layer "top" (solid, remove dead copper, pour order 0): 1000.32,6630.03 1007.05,1117.98 8874.21,1117.98 8874.02,6630.03
GND on Bottom Layer "btm" (solid, remove dead copper, pour order 2): 1001,6629.06 1001,1114.98 8875,1117.98 8865.47,3874.41 8875,6630.03

## Keep-outs
Keep-Out Layer:
  circle w5: c2102,4787 r462
  lines w5: 7986.59,1117.81 ccw(c7987.09,1156.68) 8025.96,1156.19 ; 7986.59,1118 1031.03,1117.97 cw(c1031.03,1149) 1000,1149 1000,6599 cw(c1031.03,6599) 1031.03,6630.03 8842.98,6630.03 cw(c8842.98,6599) 8874.02,6599 8874.01,3144.19 ; 8026.14,3067.94 8026.15,3068.16 ; 8026.36,1157.23 8026.36,3068.7 ; 8026.36,3068.16 cw(c8064.8,3067.67) 8065.29,3106.11 ; 8064.8,3105.89 8834.85,3105.89 ; 8834.59,3105.81 ccw(c8835.09,3144.68) 8873.96,3144.19

## Silkscreen, mask and mechanical layers (free items; w line width, h text height)
Top Overlay:
  circle w31.5: c5443.96,1712.6 r58.49
  circle w31.5: c6803.62,1712.6 r58.49
  circle w31.5: c7874.57,3118.62 r58.49
  circle w31.5: c4580.15,3118.62 r58.49
  circle w31.5: c8260.16,3240.43 r58.49
  circle w31.5: c5740.47,3240.42 r58.49
  circle w39.37: c2952.76,6482.29 r66.93
  circle w39.37: c4291.34,6492.13 r66.93
  circle w39.37: c2952.76,5143.71 r66.93
  lines w10: 1412.53,4081.54 ccw(c1472.2,4074.21) 1479.53,4014.54 ; 1412.53,5471.6 cw(c1472.89,5473.77) 1478.06,5533.95 ; 1412.66,4085.34 1412.66,4786.46 ; 1412.64,5171.88 1412.64,5471.6 ; 1476.73,5533.73 2722.27,5533.73 ; 1479.33,4014.16 2732.59,4014.16 ; 2720.08,5533.97 cw(c2716.08,5457.97) 2791.79,5465.76 ; 2732.59,4014.53 ccw(c2730.49,4076.03) 2791.99,4073.93 ; 2792.03,4076.03 2792.03,5465.76 ; 5648,3474.29 2857,3474.29 2857,6583 5961,6583 5961,5368.74 ; 5971.99,3655.62 5971.99,4213.95
  lines w20: 2265.21,1541.92 2266.29,1543 ; 2978.97,4308.75 ccw(c3045.51,4303.29) 3044.24,4236.54 ; 2979.2,4309.8 2979.2,4891 ; 2979.92,4891 cw(c3055.28,4888.18) 3058.1,4963.53 ; 3046.79,4235.93 4217.93,4235.93 4219,4237 ; 3051.21,4963.53 4197.92,4963.53 ; 4197.88,4963.69 cw(c4197.88,4878.99) 4282.02,4869.27 ; 4214,4237 ccw(c4215.81,4303.75) 4282.56,4301.95 ; 4282.56,4300.56 4282.56,4878.89 ; 2371,1542.08 2652,1542.08 2652,3110.08 2371,3110.08 2371,1542.08
  text "19 May 2024" at 2423,3026 h32 r270
  text "RF board, rev 0.8.4, Krassi Atanassov, M0NKA" at 2493,3025.08 h32 r270
  text "mcHF Pro QRP Transceiver" at 2573,2719.08 h32 r270
  text "www.m0nka.co.uk" at 2435,2097 h32 r270
Bottom Overlay:
  circle w31.5: c1610.24,6475.59 r58.49
  circle w31.5: c8795.11,6475.59 r58.49
  circle w31.5: c4956.69,1219.68 r58.49
  circle w31.5: c1078.74,1219.68 r58.49
  circle w31.5: c7594.49,1219.68 r58.49
  lines w5: 4271,1126.83 4271,3319.68 7995,3319.68 7995,1126.83 4271,1126.83
Mechanical 1:
  lines w5: 1000,1117.88 8874.01,1117.88 ; 1000,1117.97 1000,6630.03 ; 1000,3877 8874.02,3877 ; 1000,6630 8874.02,6630 ; 8874.02,1117.97 8874.01,6630.03
  text "ToDo: Add testpoints" at 8779.83,6811.14 h32
Mechanical 20:
  lines w10: 1078.74,1219.68 7594.49,1219 ; 1610.24,6475.59 8795.11,6475.59

## Dimensions
1000,3877 to 1161,1987.4 on Mechanical 1
1161,3011.02 to 1000,3877 on Mechanical 1
1044,3880 to 1078.75,6320.87 on Mechanical 1
1044,3880 to 1079.71,5887.8 on Mechanical 1
1772,3880 to 1084.71,5454.72 on Mechanical 1
1659,3882 to 1013.99,5023.62 on Mechanical 1
1079.11,4390.94 to 821,3879 on Mechanical 1
1079.11,3955.91 to 777,3877 on Mechanical 1
8818,3874 to 8874.02,3107 on Mechanical 1
8795.11,6475.59 to 1610.24,6475.59 on Mechanical 16
8795.11,6475.59 to 8874.01,6630.03 on Mechanical 16
8795.11,6475.59 to 8874.02,3877 on Mechanical 16
8874.02,3877 to 8965,6062.2 on Mechanical 16
1078.74,1219.68 to 1031.03,1117.97 on Mechanical 16
4956.69,1219.68 to 7594.49,1219.68 on Mechanical 16
4956.69,1219.68 to 1078.74,1219.68 on Mechanical 16
1000,3877 to 1078.74,1219.68 on Mechanical 16
1708.5,6597.64 to 1000,6630.03 on Mechanical 1
6753.74,6017.29 to 8874.01,6630.03 on Mechanical 1
2487.64,6219.69 to 1000,3877 on Mechanical 1
6753.74,6017.29 to 8874.02,3877 on Mechanical 1
2857,6583 to 5961,6583 on Mechanical 15
2857,6583 to 1000,6599 on Mechanical 15
7386,2139.06 to 8024,1117.98 on Mechanical 1
7386,2139.06 to 8874.01,1117.88 on Mechanical 1
8881,5122 to 8781.83,6595.27 on Mechanical 1
2102,4787 to 839,3879 on Mechanical 1
1044,3880 to 1000,1117.88 on Mechanical 1
8874.02,6630 to 8874.01,1117.88 on Mechanical 1
1000,6630.03 to 8874.01,6630.03 on Mechanical 1

## Text inside footprints (layer, text, board x,y; h text height)
BH1: Bottom Overlay "5S - 21700, v 0.1" at 7285.61,4824.08 h60
K1: Top Overlay "2G/2F" at 5825.9,2223.9 h32 r270
K2: Top Overlay "2G/2F" at 5866.9,2706.9 h32 r270
K3: Top Overlay "2G/2F" at 6694.9,2677.9 h32 r270
K4: Top Overlay "2G/2F" at 6701.5,1468.88 h32 r270
T3: Top Overlay "3T" at 4437.77,2695.38 h60; Top Overlay "1T" at 4073.6,2616.64 h60
U7: Top Overlay "v 0.2" at 8384.56,4143.06 h32 r180
U8: Top Overlay "v 0.2" at 7492.07,4150.06 h32 r180